# Altium PCB hd-hdr-alt.PcbDoc
Units mil, origin at the board's own origin, x right, y up, seen from the top; angles counter-clockwise.
Board outline 1400 x 650 mil, 6 copper layers (Top, 2-GND, 3-SIG, 4-SIG, 5-GND, Bottom), stack 46.142 mil thick; 54 components, 39 nets, 207 pads, 114 vias.
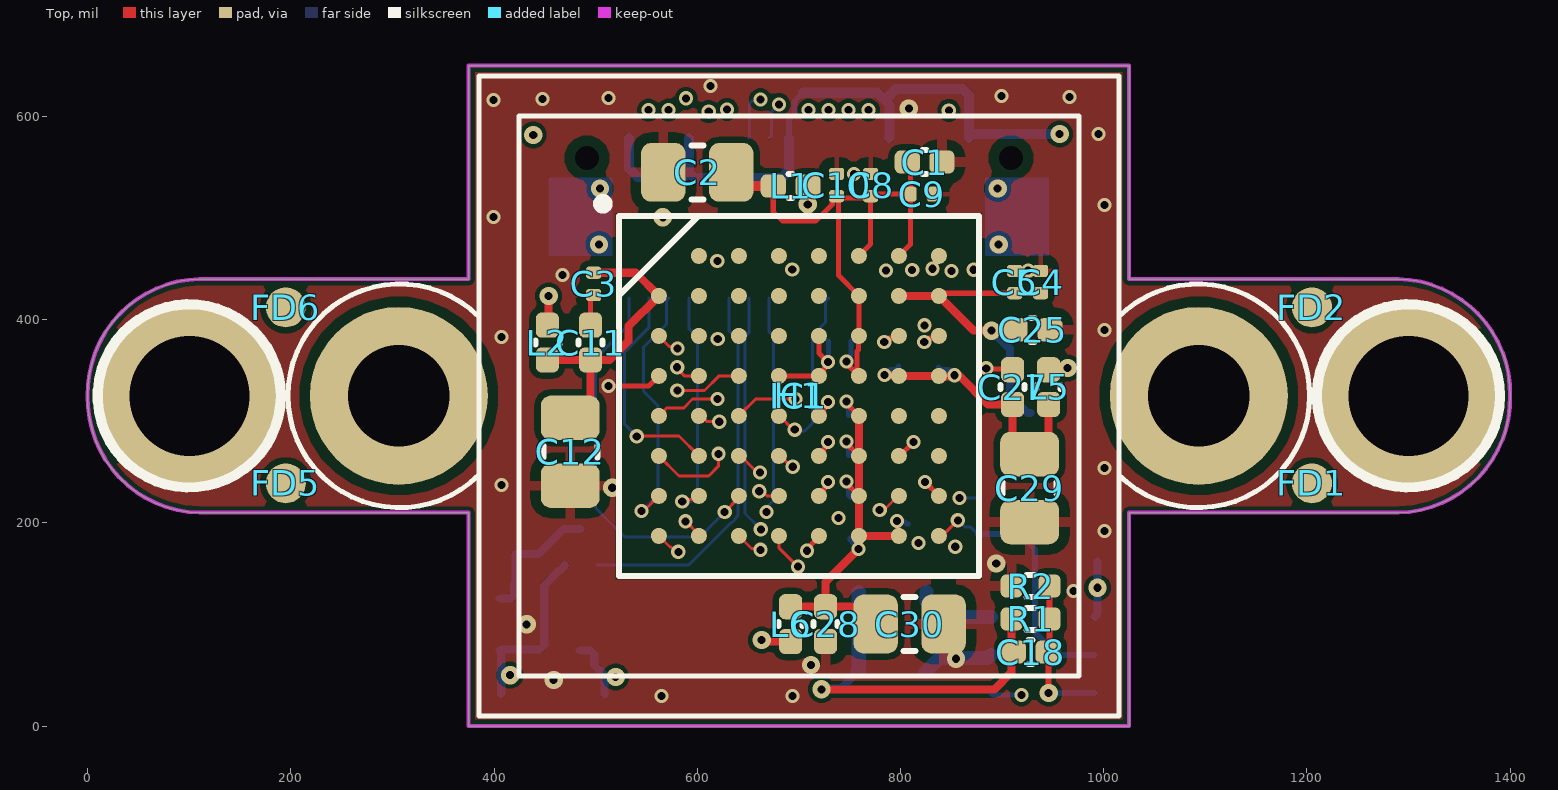
[diagram p0: Top view]
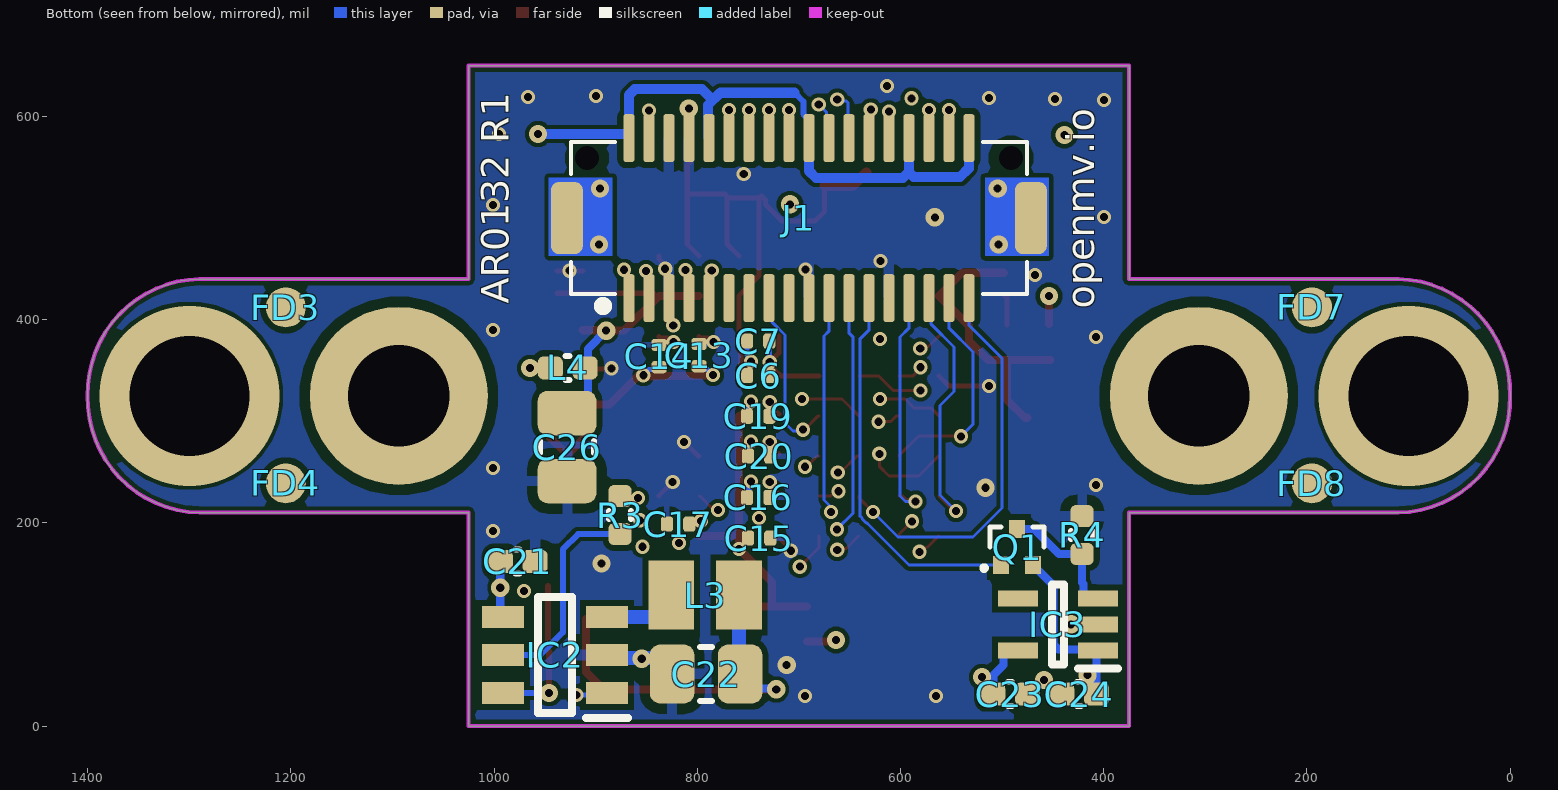
[diagram p1: Bottom view, seen from below]
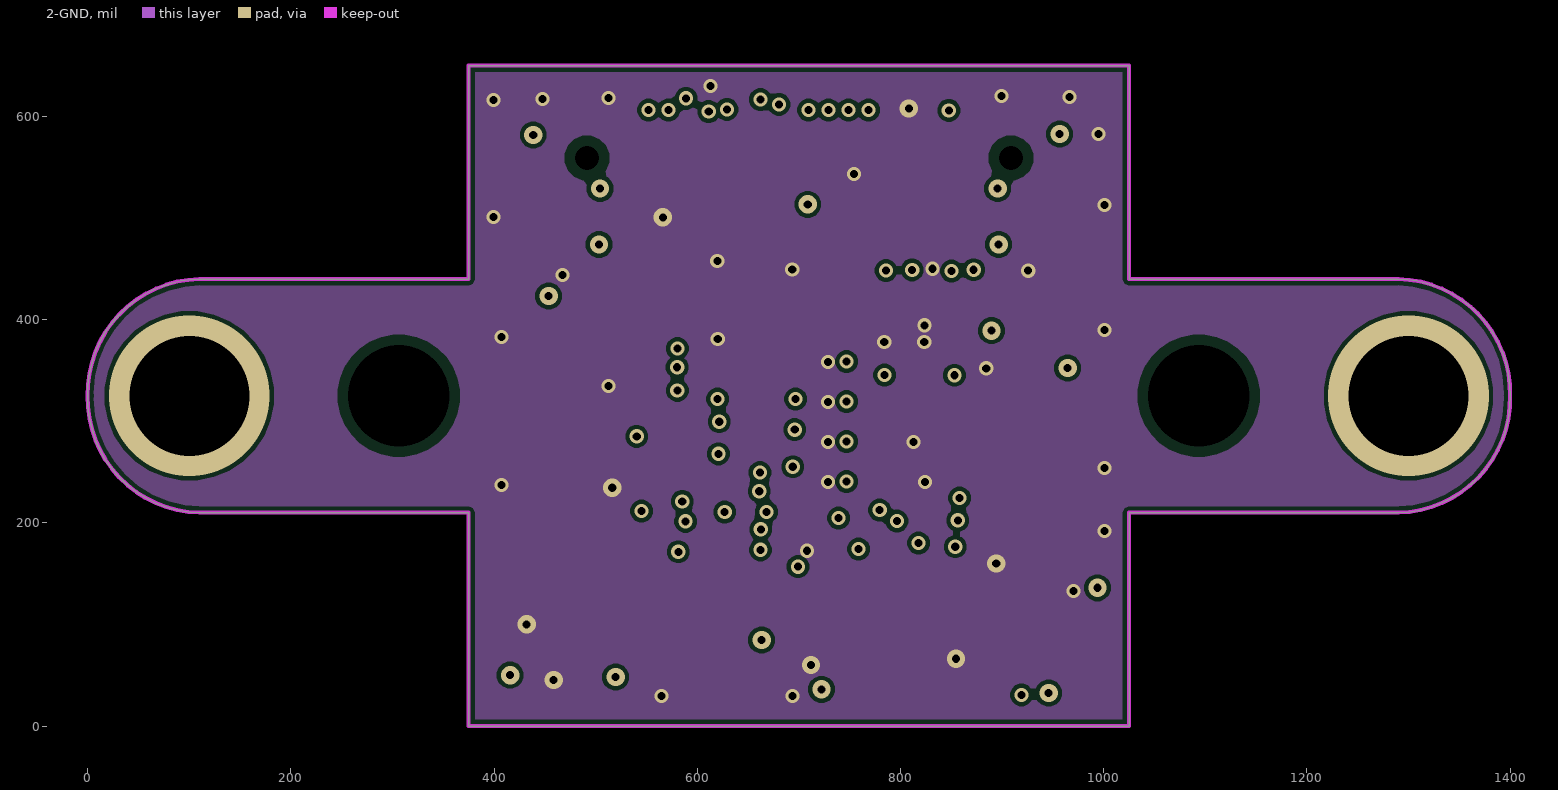
[diagram p2: 2-GND]
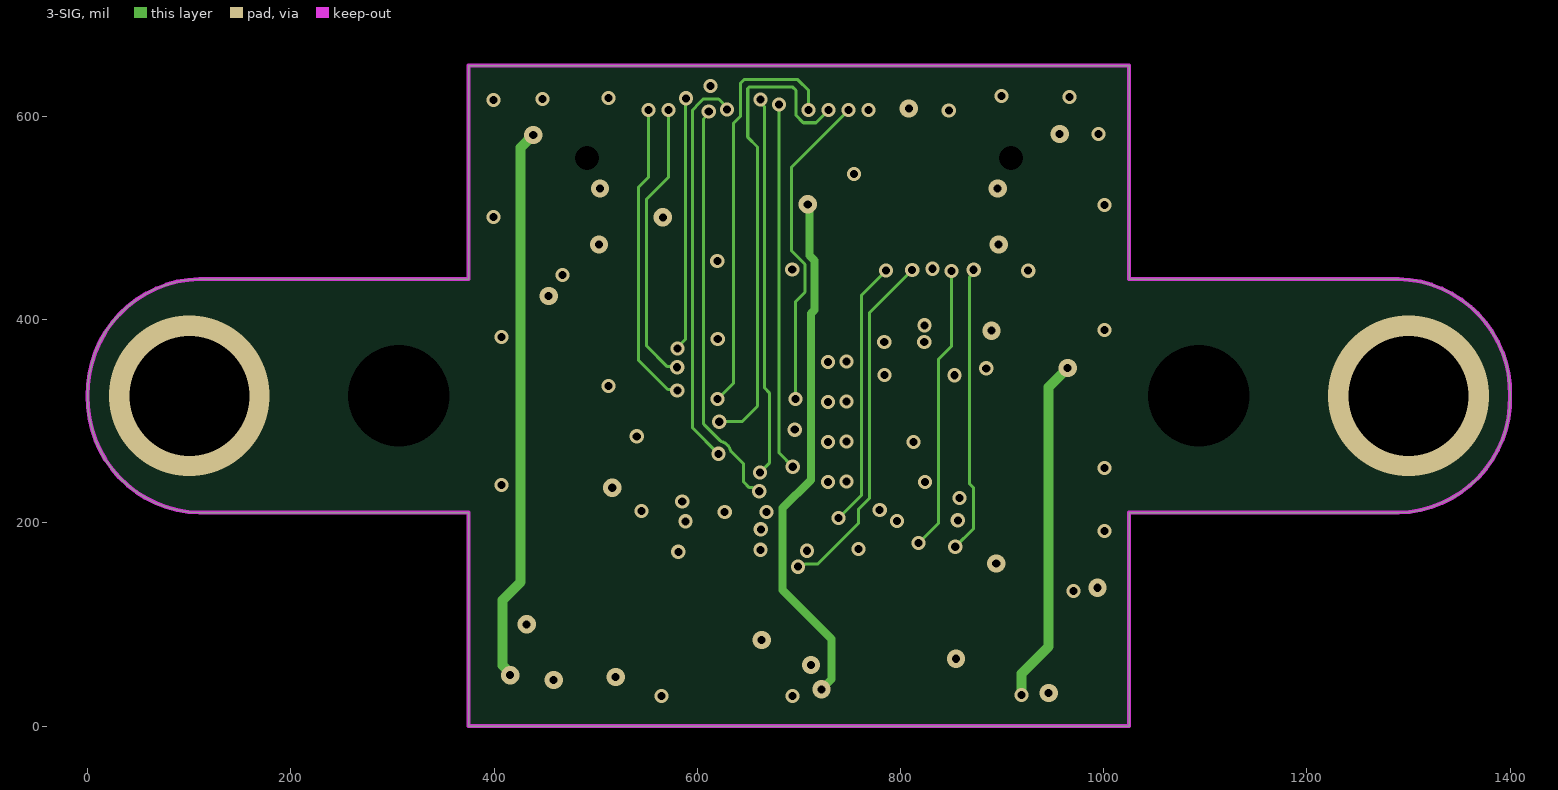
[diagram p3: 3-SIG]
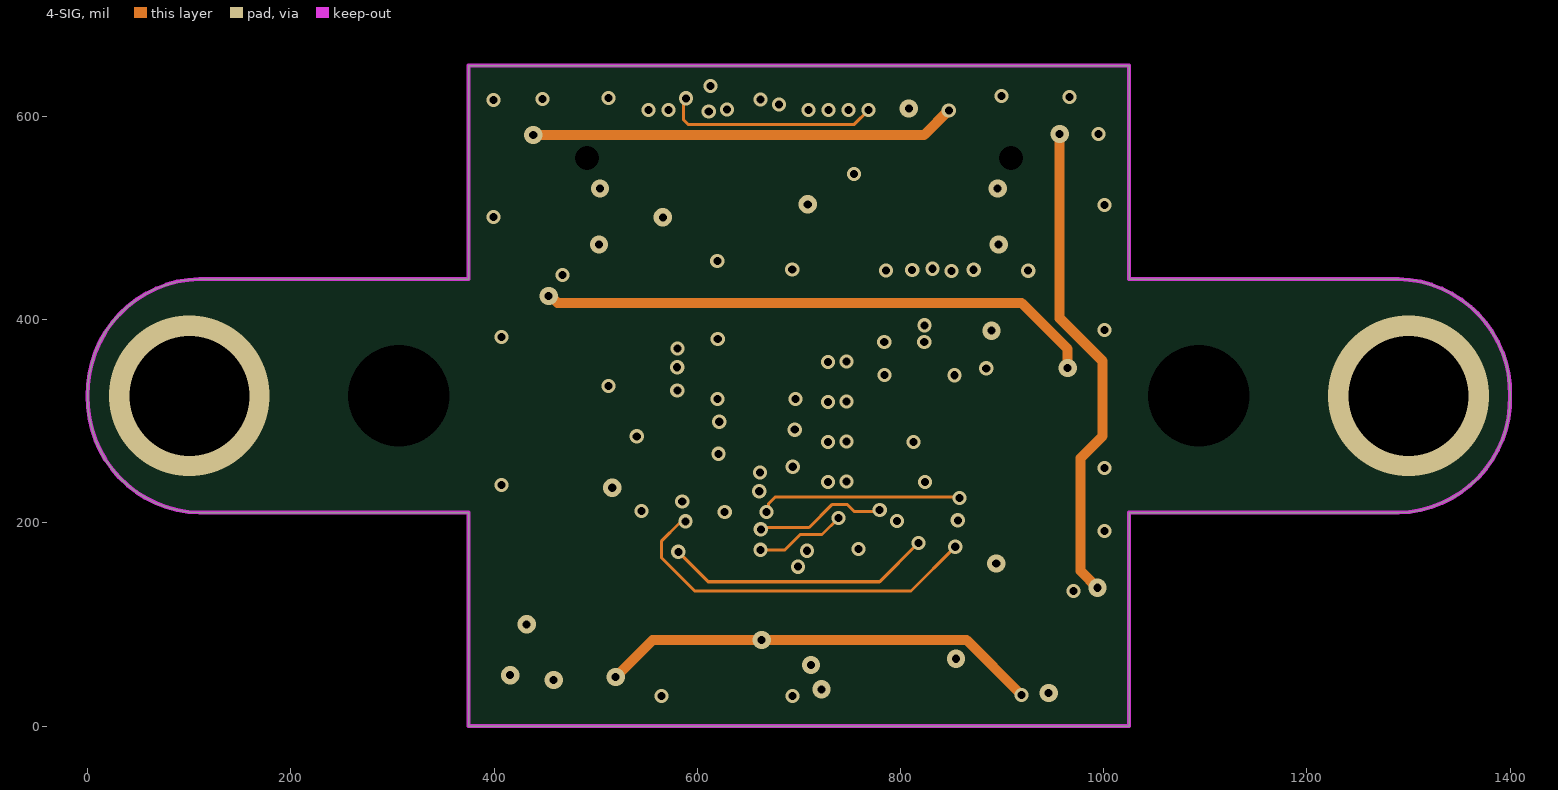
[diagram p4: 4-SIG]
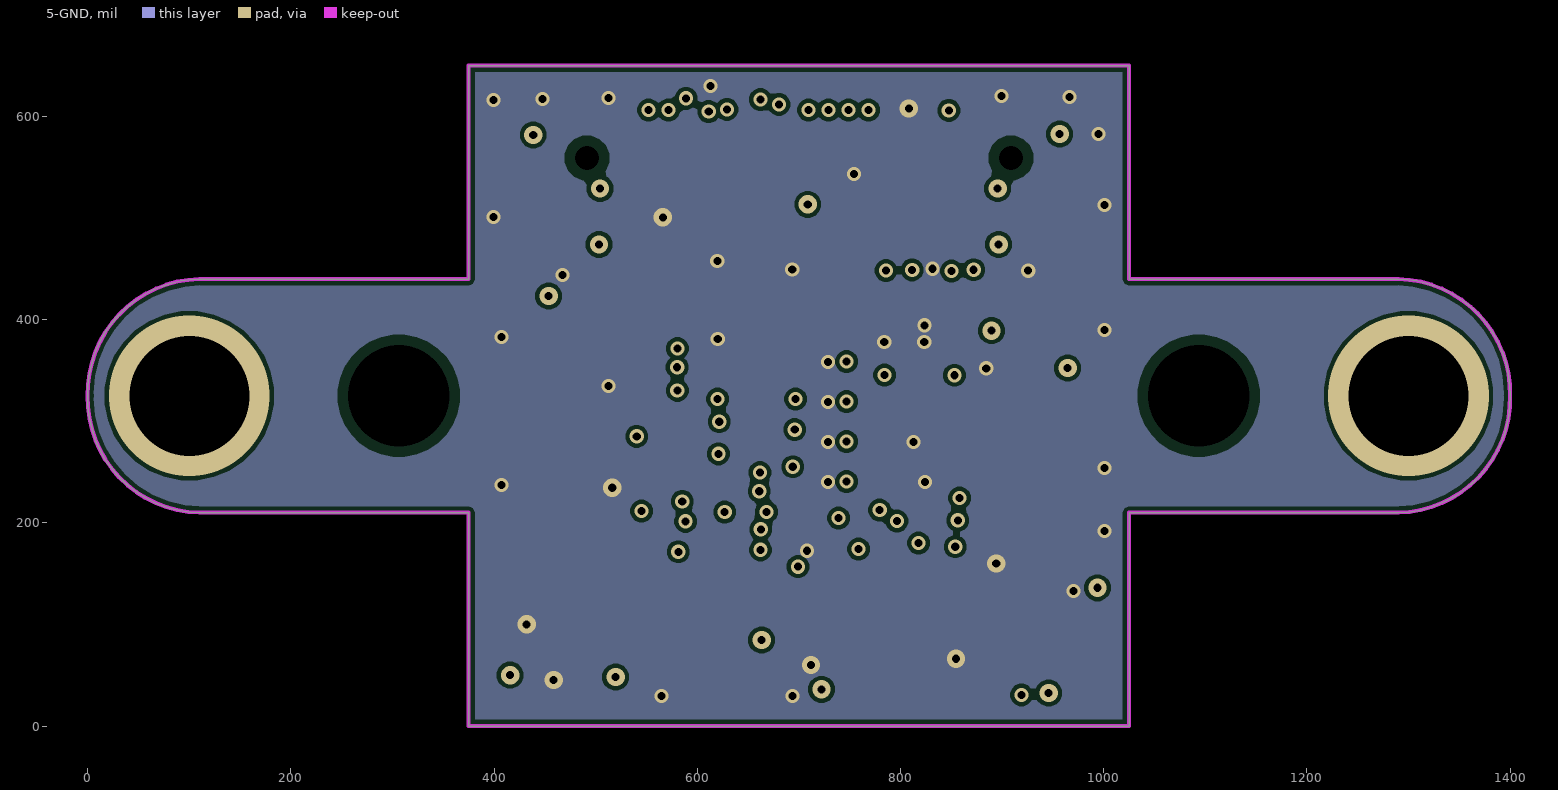
[diagram p5: 5-GND]
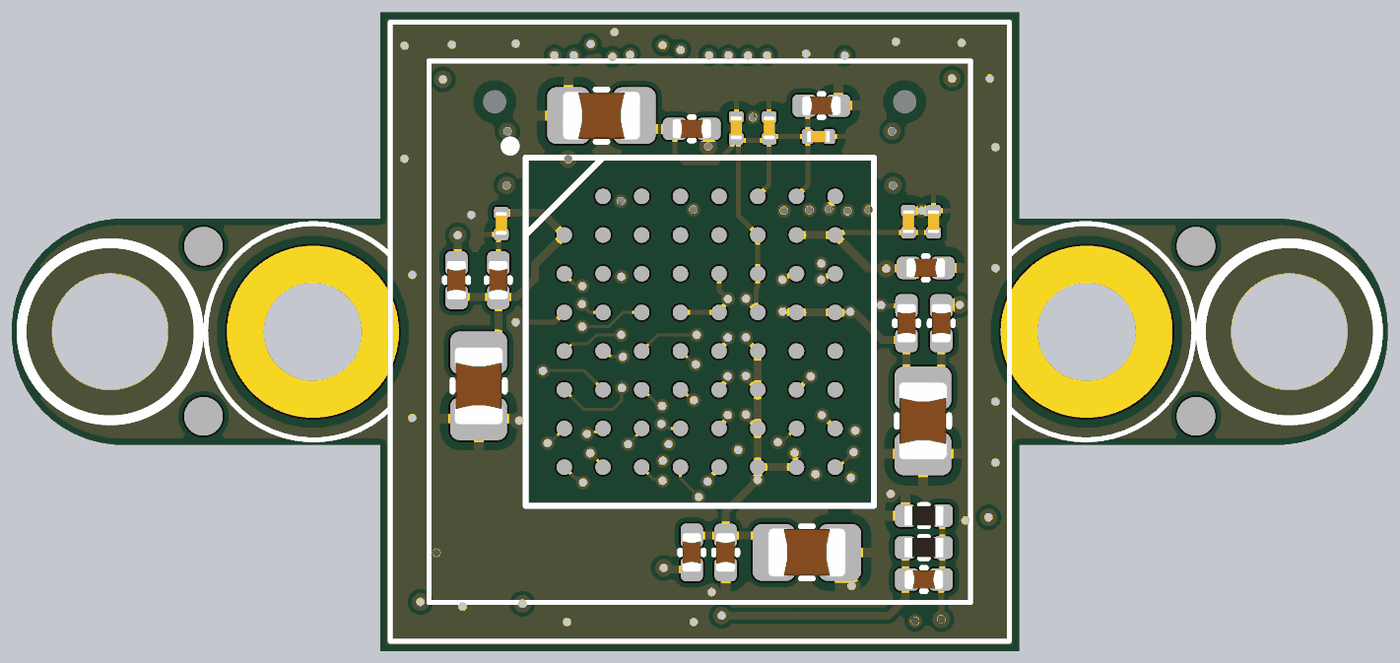
[diagram p6: 3D render of the assembled board from above, using the file's embedded part models]
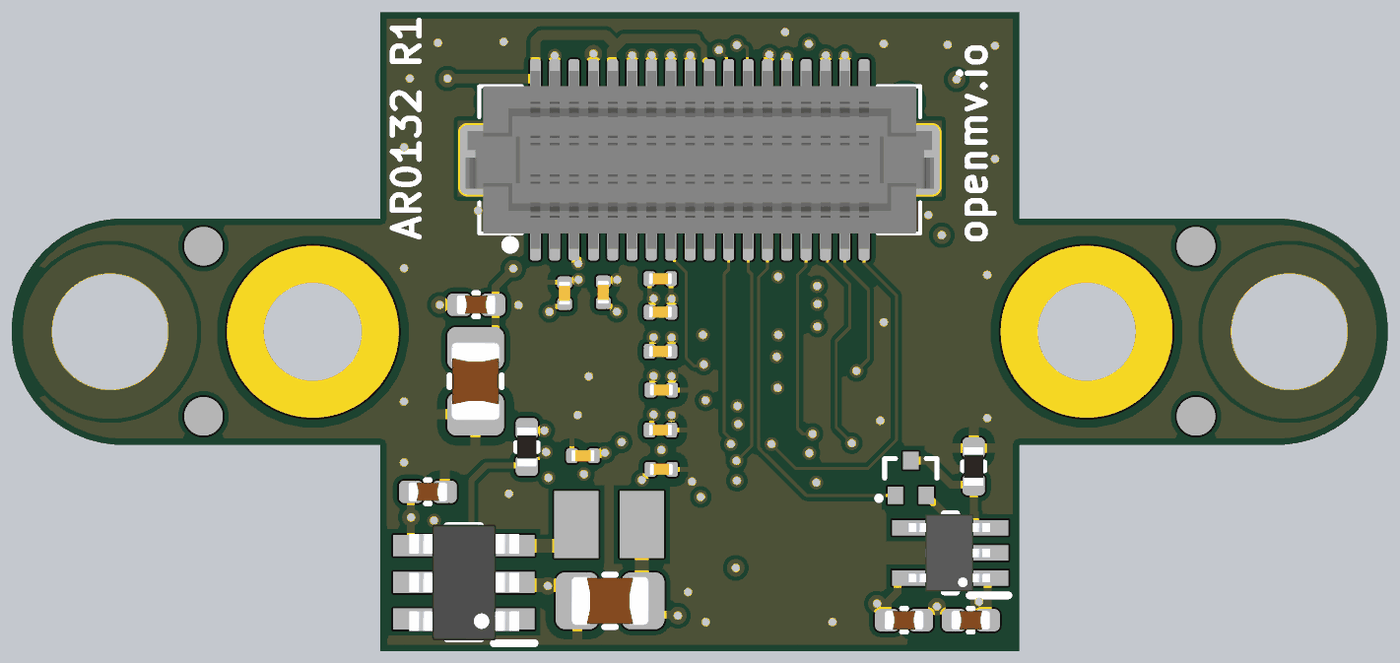
[diagram p7: 3D render of the assembled board from below, using the file's embedded part models]

## Layer stack, top to bottom
Top Solder: solder mask 0.4, Solder Resist, Dk 3.5
Top: signal copper 1.378
Dielectric 2: prepreg 5, PP-006, Dk 4.1
2-GND: signal copper 1.378
Dielectric 3: prepreg 10, PP-006, Dk 4.1
3-SIG: signal copper 1.378
Dielectric 1: dielectric 7.874, FR-4, Dk 4.8
4-SIG: signal copper 1.378
Dielectric 4: prepreg 10, PP-006, Dk 4.1
5-GND: signal copper 1.378
Dielectric 5: prepreg 5, PP-006, Dk 4.1
Bottom: signal copper 1.378
Bottom Solder: solder mask 0.4, Solder Resist, Dk 3.5

## Board outline
1290.03,210 1025.03,210 1025.03,0 375.03,0 375.03,210 110.03,210 cw(c112.53,322.5) 0.03,325 cw(c112.53,327.5) 110.03,440 375.03,440 375.03,650 1025.03,650 1025.03,440 1290.03,440 cw(c1287.53,327.5) 1400.03,325 cw(c1287.53,322.5)

## Design rules (kind name [scope] priority, off if disabled: settings)
BoardOutlineClearance mdCopperDimension [All] p1: gap=4 ignorepadtopadclearanceinfootprint=FALSE
Clearance [All] p1: gap=4 ignorepadtopadclearanceinfootprint=FALSE except(6: SMDPad-Fill SMDPad-Poly SMDPad-Region; 10: THPad-Fill THPad-Poly THPad-Region)
ComponentClearance "lens cover" [InComponent('H1')] p1: gap=0 collisioncheckmode=3 verticalgap=0 showdistances=FALSE
ComponentClearance [All] p2: gap=10 collisioncheckmode=3 verticalgap=10 showdistances=FALSE
HoleSize HoleSize_For_NetClass_signal [InNetClass('signal')] p1: absolutevalues=TRUE maxlimit=4 minlimit=4 maxpercent=80.000 minpercent=20.000
HoleSize HoleSize_For_NetClass_pwr [InNetClass('pwr')] p2: absolutevalues=TRUE maxlimit=4 minlimit=4 maxpercent=80.000 minpercent=20.000
HoleSize HoleSize_For_NetClass_gnd [InNetClass('gnd')] p3: absolutevalues=TRUE maxlimit=4 minlimit=4 maxpercent=80.000 minpercent=20.000
HoleSize [All] p4: absolutevalues=TRUE maxlimit=100000 minlimit=4 maxpercent=80.000 minpercent=20.000
HoleToHoleClearance mdDrill [All] p1: gap=3 allowstackedmicrovias=TRUE
MinimumSolderMaskSliver [All] p1 off: minsoldermaskwidth=10
PasteMaskExpansion Expansion_SMDPaste_OFF [InPadClass('SMDPaste_OFF')] p1: expansion=0
PasteMaskExpansion mlMinCreamFrame [All] p2: expansion=0
PolygonConnect 0201 [HasFootprint('C0201')] p1: thpad.connectstyle=Relief thpad.reliefconductorwidth=5 thpad.reliefentries=4 thpad.polygonreliefangle="90 Angle" thpad.airgapwidth=10 smdpad.connectstyle=Relief smdpad.reliefconductorwidth=5 smdpad.reliefentries=4 smdpad.polygonreliefangle="90 Angle" smdpad.airgapwidth=10 via.connectstyle=Relief via.reliefconductorwidth=10 via.reliefentries=4 via.polygonreliefangle="90 Angle" via.airgapwidth=10
PolygonConnect [All] p2: thpad.connectstyle=Relief thpad.reliefconductorwidth=10 thpad.reliefentries=4 thpad.polygonreliefangle="90 Angle" thpad.airgapwidth=10 smdpad.connectstyle=Relief smdpad.reliefconductorwidth=10 smdpad.reliefentries=4 smdpad.polygonreliefangle="90 Angle" smdpad.airgapwidth=10 via.connectstyle=Direct via.reliefconductorwidth=10 via.reliefentries=4 via.polygonreliefangle="90 Angle" via.airgapwidth=10
RoutingVias [All] p1: holewidth=8 width=16 viastyle="Through Hole" minholewidth=8 minwidth=14 maxholewidth=100 maxwidth=100
SolderMaskExpansion mlMinStopFrame [All] p1: expansion=2 istentingtop=FALSE
Width [All] p1: maxlimit=100 minlimit=3 preferedwidth=3
25 further rules are at their usual default settings.

## Classes and differential pairs
pad class SMDPaste_OFF: FD1-1 FD2-1 FD3-1 FD4-1 FD5-1 FD6-1 FD7-1 FD8-1 J1-1 J1-2 J1-3 J1-4 J1-5 J1-6 J1-7 J1-8 J1-9 J1-10 J1-11 J1-12 J1-13 J1-14 J1-15 J1-16 J1-17 J1-18 J1-19 J1-20 J1-21 J1-22 J1-23 J1-24 J1-25 J1-26 J1-27 J1-28 J1-29 J1-30 J1-31 J1-32 J1-33 J1-34 J1-35 J1-36

## Components (designator, comment, footprint, x,y, rotation, side; value= is the part's Value field where it differs from the comment)
C1 "4.7uF" 0402 823.82,555.12 r180 top
C2 "22uF" 0805 600.03,545 r0 top
C3 "0.22uF" C0201 498.03,435.21 r270 top
C4 "0.22uF" C0201 937.99,437.01 r90 top
C5 "0.22uF" C0201 912.4,437.01 r90 top
C6 "0.22uF" C0201 740.03,345 r180 bottom
C7 "0.22uF" C0201 740.16,378.94 r180 bottom
C8 "0.22uF" C0201 770.67,532.48 r90 top
C9 "0.22uF" C0201 820.87,523.62 r0 top
C10 "0.22uF" C0201 737.2,532.48 r90 top
C11 "4.7uF" 0402 495.03,377.5 r270 top
C12 "22uF" 0805 475.03,270 r90 top
C13 "0.22uF" C0201 798.23,365.16 r90 bottom
C14 "0.22uF" C0201 837.6,364.17 r90 bottom
C15 "0.22uF" C0201 739.17,185.04 r180 bottom
C16 "0.22uF" C0201 740.03,225 r180 bottom
C17 "0.22uF" C0201 818.9,198.82 r0 bottom
C18 "6.8pF" 0402 928.15,72.83 r0 top
C19 "0.22uF" C0201 740.03,305 r180 bottom
C20 "0.22uF" C0201 739.17,265.75 r180 bottom
C21 "4.7uF" 0402 976.76,162.09 r0 bottom
C22 "22uF" 0805 791.34,51.18 r180 bottom
C23 "4.7uF" 0402 492.13,31.5 r0 bottom
C24 "4.7uF" 0402 424.21,31.5 r180 bottom
C25 "4.7uF" 0402 930.03,390 r180 top
C26 "22uF" 0805 928.15,274.61 r90 bottom
C27 "4.7uF" 0402 910.43,333.66 r270 top
C28 "4.7uF" 0402 726.38,100.39 r90 top
C29 "22uF" 0805 927.17,234.25 r90 top
C30 "22uF" 0805 809.06,100.39 r180 top
FD1 "FIDUCIAL1X2" FIDUCIAL-1X2 1205.03,238.94 r0 top
FD2 "FIDUCIAL1X2" FIDUCIAL-1X2 1205.03,412.05 r0 top
FD3 "FIDUCIAL1X2" FIDUCIAL-1X2 1205.03,412.05 r180 bottom
FD4 "FIDUCIAL1X2" FIDUCIAL-1X2 1205.03,238.94 r180 bottom
FD5 "FIDUCIAL1X2" FIDUCIAL-1X2 195.03,238.94 r0 top
FD6 "FIDUCIAL1X2" FIDUCIAL-1X2 195.03,412.05 r0 top
FD7 "FIDUCIAL1X2" FIDUCIAL-1X2 195.03,412.05 r180 bottom
FD8 "FIDUCIAL1X2" FIDUCIAL-1X2 195.03,238.94 r180 bottom
H1 "LENSMOUNT20MM" LENSMOUNT-20MM 700.03,325 r0 top locked
IC1 "AR0132AT6C00XPEA0" AR0132AT6C00XPEA0 700.03,325 r0 top locked
IC2 "TLV62568PDDCR" SOT95P280X110-6N 940.03,70 r0 bottom
IC3 "MIC5365-2.8YC5-TR" SOT65P210X110-5N 445.03,100 r0 bottom
J1 "DF12-36-DP" DF12-36-DP 700.03,500 r0 bottom locked
L1 "100" 0402 691.93,531.5 r0 top
L2 "100" 0402 452.53,377.5 r90 top
L3 "MAKK2016T2R2M" INDC2016X100N 792.32,128.94 r0 bottom
L4 "100" 0402 927.53,352.5 r0 bottom
L5 "100" 0402 945.87,333.66 r90 top
L6 "100" 0402 691.93,100.39 r270 top
Q1 "SSM3J15FV,L3F" SSM3J15FV 485.24,176.18 r180 bottom
R1 "200K" R0402 928.15,105.31 r180 top
R2 "100K" R0402 928.15,137.8 r180 top
R3 "10K" R0402 875.98,207.68 r90 bottom
R4 "100K" R0402 421.26,187.99 r90 bottom

## Footprints (in the part's own frame and the unit in brackets; to place one, negate y for a bottom-side part, rotate by r counter-clockwise, add the part's x,y. Pads: shape width x height; smd on the part's side, far side on the other; paste and mask are expansions set on the pad)
0402 [mm] "Chip Capacitor, 2-Leads, Body  0402 (in) 1005 (mm), IPC Medium Density"
  rrect52% 0.63x0.58 smd mask+0.05: 1(-0.435,0) 2(0.435,0)
  silkscreen extent -0.05,-0.3 0.05,0.3, body extent -0.5,-0.25 0.5,0.25, height 0.5
0805 [mm] "Chip Capacitor, Body 0805 imperial, 2.0x1.2mm, IPC Medium Density"
  rrect45% 1.11x1.47 smd: 1(-0.85,0) 2(0.85,0)
  silkscreen extent -0.15,-0.67 0.15,0.67, body extent -1,-0.62 1,0.63, height 1.25
AR0132AT6C00XPEA0 [mil] "AR0132AT6C00XPEA0"
  rrect100% 15.75x15.75 smd: P$1(-98.43,137.8) P$2(-59.06,137.8) P$3(-19.69,137.8) P$4(19.69,137.8) P$5(59.06,137.8) P$6(98.43,137.8) P$7(137.8,137.8) P$8(-137.8,98.43) P$9(-98.43,98.43) P$10(-59.06,98.43) P$11(-19.69,98.43) P$12(19.69,98.43) P$13(59.06,98.43) P$14(98.43,98.43) P$15(137.8,98.43) P$16(-137.8,59.06) P$17(-98.43,59.06) P$18(-59.06,59.06) P$19(-19.69,59.06) P$20(19.69,59.06) P$21(59.06,59.06) P$22(98.43,59.06) P$23(137.8,59.06) P$24(-137.8,19.69) P$25(-98.43,19.69) P$26(-59.06,19.69) P$27(-19.69,19.69) P$28(19.69,19.69) P$29(59.06,19.69) P$30(98.43,19.69) P$31(137.8,19.69) P$32(-137.8,-19.69) P$33(-98.43,-19.69) P$34(-59.06,-19.69) P$35(-19.69,-19.69) P$36(19.69,-19.69) P$37(59.06,-19.69) P$38(98.43,-19.69) P$39(137.8,-19.69) P$40(-137.8,-59.06) P$41(-98.43,-59.06) P$42(-59.06,-59.06) P$43(-19.69,-59.06) P$44(19.69,-59.06) P$45(59.06,-59.06) P$46(98.43,-59.06) P$47(137.8,-59.06) P$48(-137.8,-98.43) P$49(-98.43,-98.43) P$50(-59.06,-98.43) P$51(-19.69,-98.43) P$52(19.69,-98.43) P$53(59.06,-98.43) P$54(98.43,-98.43) P$55(137.8,-98.43) P$56(-137.8,-137.8) P$57(-98.43,-137.8) P$58(-59.06,-137.8) P$59(-19.69,-137.8) P$60(19.69,-137.8) P$61(59.06,-137.8) P$62(98.43,-137.8) P$63(137.8,-137.8)
  silkscreen extent -198,-177 177,194, body extent -177,-177 177,177, height 39
C0201 [mil] "0201 IPC-7351"
  rrect50% 12x15 smd mask+1.97: 1(-11,0) 2(11,0)
  body extent -12,-6 12,6, height 14
DF12-36-DP [mm] "36 Position Connector Receptacle, Center Strip Contacts Surface Mount Gold"
  rrect50% 0.8x1.8 smd mask+0.05: 0(-5.8,0) 0(5.8,0)
  rrect50% 0.28x1.2 smd mask+0.05: 1(4.25,2) 2(4.25,-2) 3(3.75,2) 4(3.75,-2) 5(3.25,2) 6(3.25,-2) 7(2.75,2) 8(2.75,-2) 9(2.25,2) 10(2.25,-2) 11(1.75,2) 12(1.75,-2) 13(1.25,2) 14(1.25,-2) 15(0.75,2) 16(0.75,-2) 17(0.25,2) 18(0.25,-2) 19(-0.25,2) 20(-0.25,-2) 21(-0.75,2) 22(-0.75,-2) 23(-1.25,2) 24(-1.25,-2) 25(-1.75,2) 26(-1.75,-2) 27(-2.25,2) 28(-2.25,-2) 29(-2.75,2) 30(-2.75,-2) 31(-3.25,2) 32(-3.25,-2) 33(-3.75,2) 34(-3.75,-2) 35(-4.25,2) 36(-4.25,-2)
  round 0 hole 0.6 unplated: MH1(-5.3,-1.5) MH2(5.3,-1.5)
  silkscreen extent -5.7,-1.9 5.7,2.3, body extent -6.05,-2.3 6.05,2.3, height 2.3
FIDUCIAL-1X2 [mm] "FIDUCIAL-1X2"
  rrect100% 1x1 smd paste+0: 1(0,0)
INDC2016X100N [mm] "INDC2016X100N"
  rect 1.14x1.73 smd: 1(-0.847,0) 2(0.847,0)
  body extent -1,-0.8 1,0.8, height 1
LENSMOUNT-20MM [mil] "LENSMOUNT-20MM"
  round 175 / inner round 0 / far side round 175 hole 100: P$1(-393.7,0) P$2(393.7,0)
  silkscreen extent -503,-315 503,315
R0402 [mm] "Chip Resistor, 2-Leads, Body  0402 (in) 1005 (mm), IPC Medium Density"
  rrect51% 0.55x0.58 smd mask+0.05: 1(-0.475,0) 2(0.475,0)
  silkscreen extent -0.1,-0.28 0.1,0.28, body extent -0.5,-0.25 0.5,0.25, height 0.34
SOT65P210X110-5N [mm] "SOT65P210X110-5N"
  rect 1x0.4 smd: 1(-1,0.65) 2(-1,0) 3(-1,-0.65) 4(1,-0.65) 5(1,0.65)
  silkscreen extent -1.5,-1 0.15,1.1, body extent -1.02,-1 1.07,1, height 0.96
SOT95P280X110-6N [mil] "SOT95P280X100-6N"
  rect 41.34x21.65 smd: 1(-51.18,37.4) 2(-51.18,0) 3(-51.18,-37.4) 4(51.18,-37.4) 5(51.18,0) 6(51.18,37.4)
  silkscreen extent -72,-57 17,62, body extent -56,-59 56,59, height 44
SSM3J15FV [mm]
  rect 0.4x0.45 smd: 1(-0.4,-0.45) 2(0.4,-0.45) 3(0,0.45)
  silkscreen extent -0.88,-0.58 0.67,0.5, body extent -0.6,-0.6 0.6,0.6, height 0.6

## Part data
C1 C11 C21 C23 C24 C25 C27 C28: library part CAP_0402, "0402 (1005 Metric) Nick Garner - TeleSense", MPN=JMK105BBJ475MV-F, DeviceSetName=CAP_0402, GateName_1=G$1, LibraryName=0402, SymbolName_1=CAP
C2 C12 C22 C26 C29 C30: library part 22UF-0805-6.3V-20%, "22ÂµF ceramic capacitors    A capacitor is a passive two-terminal electrical component used to store electrical energy temporarily in an electric field.", MPN=CL21A226MQQNNNE, DeviceName=-0805-6.3V-20%, DeviceSetName=22UF, GateName_1=G$1, LibraryName=SparkFun-Capacitors, PROD_ID=CAP-08402, SymbolName_1=CAP
C3 C4 C5 C6 C7 C8 C9 C10 C13 C14 C15 C16 C17 C19 C20: library part C-EUC0201, "CAPACITOR, European symbol", MPN=GRM033R60J224ME15D, DeviceName=C0201, DeviceSetName=C-EU, GateName_1=G$1, LibraryName=rcl, POPULARITY=0, SPICEPREFIX=C, SymbolName_1=C-EU
C18: library part CAP_0402, "0402 (1005 Metric) Nick Garner - TeleSense", MPN=GRM1555C1H6R8DA01D, DeviceSetName=CAP_0402, GateName_1=G$1, LibraryName=0402, SymbolName_1=CAP
FD1 FD2 FD3 FD4 FD5 FD6 FD7 FD8: "Fiducial Alignment Points    Point-of-reference for pick-and-place machines and other optical instruments.", DeviceName=1X2, DeviceSetName=FIDUCIAL, GateName_1=G$1, LibraryName=SparkFun-Aesthetics, SymbolName_1=FIDUCIAL
IC1: MPN=AR0132AT6C00XPEA0-TPBR, DeviceSetName=AR0132AT6C00XPEA0, GateName_1=G$1, LibraryName=AR0132AT6C00XPEA0, Part Number=AR0132AT6C00XPEA0-TPBR, SymbolName_1=AR0132AT6C00XPEA0
IC2: "2.5V-5.5V input, 1A high efficiency step-down buck converter in SOT23 and SOT563 package   Source:  Datasheet", MANUFACTURER_NAME="Texas Instruments", DeviceSetName=TLV62568PDDCR, GateName_1=G$1, HEIGHT=1.1mm, LibraryName=TLV62568PDDCR, MANUFACTURER_PART_NUMBER=TLV62568PDDCR, MOUSER_PART_NUMBER=595-TLV62568PDDCR, MOUSER_PRICE-STOCK=https://www.mouser.co.uk/ProductDetail/Texas-Instruments/TLV62568PDDCR?qs=1mbolxNpo8f1FPchIXcxyQ%3D%3D, MPN=TLV62568PDDCR, SymbolName_1=TLV62568PDDCR
IC3: "IC REG LINEAR 2.8V 150MA SC70-5   Source:  Datasheet", MANUFACTURER_NAME=Microchip, DeviceSetName=MIC5365-2.8YC5-TR, GateName_1=G$1, HEIGHT=1.1mm, LibraryName=MIC5365-2.8YC5-TR, MANUFACTURER_PART_NUMBER=MIC5365-2.8YC5-TR, MOUSER_PART_NUMBER=998-MIC5365-2.8YC5TR, MOUSER_PRICE-STOCK=https://www.mouser.co.uk/ProductDetail/Microchip-Technology-Atmel/MIC5365-2.8YC5-TR?qs=U6T8BxXiZAX3mJDSWJyjVA%3D%3D, MPN=MIC5365-2.8YC5-TR, SymbolName_1=MIC5365-2.8YC5-TR
J1: MPN=DF12NB(3.0)-36DP-0.5V(51), DeviceSetName=DF12-36-DP, GateName_1=G$1, LibraryName=DF12NB(3.0)-36DP-0.5V(51), SymbolName_1=DF12-36
L1 L2 L4 L5 L6: library part INDUCTOR_0402, MPN=MFBM1V1005-101-R, DeviceSetName=INDUCTOR_0402, GateName_1=G$1, LibraryName=0402, SymbolName_1=INDUCTOR
L3: "INDUCTOR, METAL CORE Check availability", PACKAGE="2016 Taiyo Yuden", AVAILABILITY="In Stock", DeviceSetName=MAKK2016T2R2M, GateName_1=G$1, LibraryName=MAKK2016T2R2M, MF="Taiyo Yuden", MP=MAKK2016T2R2M, MPN=MAKK2016T2R2M, PRICE=None, PURCHASE-URL=https://pricing.snapeda.com/search/part/MAKK2016T2R2M/?ref=eda, SymbolName_1=MAKK2016T2R2M
Q1: library part PMOS, GateName_1=G$1, MANUFACTURER_PART_NUMBER=SSM3J15FV,L3F, MPN=SSM3J15FV,L3F, Part Number=SSM3J15FV,L3F
R1: library part R-US_R0402, "RESISTOR, American symbol", MPN=CRCW0402200KFKEDC, DeviceName=R0402, DeviceSetName=R-US_, GateName_1=G$1, LibraryName=rcl, POPULARITY=34, SPICEPREFIX=R, SymbolName_1=R-US
R2 R4: library part R-US_R0402, "RESISTOR, American symbol", MPN=AC0402FR-07100KL, DeviceName=R0402, DeviceSetName=R-US_, GateName_1=G$1, LibraryName=rcl, POPULARITY=34, SPICEPREFIX=R, SymbolName_1=R-US
R3: library part R-US_R0402, "RESISTOR, American symbol", MPN=AC0402FR-1310KL, DeviceName=R0402, DeviceSetName=R-US_, GateName_1=G$1, LibraryName=rcl, POPULARITY=34, SPICEPREFIX=R, SymbolName_1=R-US
H1: DeviceName=20MM, DeviceSetName=LENSMOUNT, GateName_1=G$1, LibraryName=lensmount, SymbolName_1=LENS

## Via types
v1: diameter 14, hole 8, Top to Bottom, tented both sides, 88 vias
v2: diameter 18, hole 8, Top to Bottom, tented both sides, 24 vias
v3: diameter 177.17/158.11/158.11/158.11/158.11/177.17 (per signal layer), hole 118.11, Top to Bottom, 2 vias

## Nets (pads, with @x,y where several pads share a name; then routed paths per layer and width w, separated by ;. In a path a pad name is that pad's centre, name@x,y a point inside that pad or via, vN(x,y) a via of type N, cw(c..) or ccw(c..) an arc to the next point about the centre after c; other vN are vias at no path point)
DCMI_CLK: IC1.P$16 J1.12 | length 485.7
  Top w3: IC1.P$16 562.23,383.64 572.34,373.53 578.49,373.53 v1(580.55,371.48)
  3-SIG w3: v1(580.55,371.48) 580.55,372.67 588.47,380.59 588.47,617.26 v1(589.03,617.81)
  4-SIG w3: v1(589.03,617.81) 586.92,615.71 586.92,612.68 586.61,612.37 586.61,596.46 590.88,592.19 754.59,592.19 v1(768.7,606.3)
DCMI_D0: IC1.P$56 J1.3 | length 571.3
  Top w3: IC1.P$56 573.26,176.17 574.13,176.17 578.81,171.49 v1(581.39,171.49)
  3-SIG w3: v1(817.91,180.12) 837.6,199.8 837.6,361.22 850.39,374.02 v1(850.39,447.83)
  4-SIG w3: v1(581.39,171.49) 610.83,142.05 779.51,142.05 817.58,180.12 v1(817.91,180.12)
DCMI_D1: IC1.P$57 J1.1 | length 672.2
  Top w3: v1(588.57,201.48) 588.71,201.48 601.6,188.59 IC1.P$57
  3-SIG w3: v1(853.98,176.42) 872.05,194.49 872.05,234.25 868.11,238.19 868.11,442.13 872.09,446.12 v1(872.09,449.09)
  4-SIG w3: v1(588.57,201.48) 586.46,199.37 582.03,199.37 564.96,182.3 564.96,165.35 597.44,132.87 810.43,132.87 v1(853.98,176.42)
DCMI_D2: IC1.P$58 J1.9 | length 379.7
  Top w3: IC1.P$58 653.38,174.79 660.93,174.79 v1(662.29,173.43)
  3-SIG w3: v1(739.17,204.72) 761.81,227.36 761.81,424.3 v1(785.79,448.28)
  4-SIG w3: v1(662.29,173.43) 686.3,173.43 701.32,188.45 722.9,188.45 v1(739.17,204.72)
DCMI_D3: IC1.P$59 J1.7 | length 387.2
  Top w3: IC1.P$59@680.91,187.2 IC1.P$59 680.34,175.59 v1(699.06,156.87)
  3-SIG w3: v1(699.06,156.87) 701.16,158.98 705.95,158.98 706.31,159.34 718.39,159.34 758.86,199.8 758.86,213.58 769.68,224.41 769.68,407.12 v1(811.53,448.97)
DCMI_D4: IC1.P$48 J1.31 | length 255.4
  Top w3: v1(545.28,211.61) 546.61,212.95 548.61,212.95 IC1.P$48
  Bottom w3: v1(545.28,211.61) 561.17,227.51 561.17,315.42 547.24,329.35 547.24,373.03 569.83,395.62 569.83,419.02 J1.31
DCMI_D5: IC1.P$49 J1.29 | length 234.5
  Top w3: v1(585.25,221.06) 587.3,223.11 594.69,223.11 598.15,226.57 IC1.P$49
  Bottom w3: v1(585.25,221.06) 585.34,220.98 594.99,220.98 600.39,226.38 600.39,382.87 591.76,391.51 J1.29
DCMI_D6: IC1.P$50 J1.35 | length 391
  Top w3: v1(627.02,210.65) 640.97,224.6 IC1.P$50
  Bottom w3: J1.35 532.7,394.69 500,361.98 500,214.57 528.54,186.02 602.36,186.02 v1(627.02,210.65)
DCMI_D7: IC1.P$51 J1.28 | length 424.3
  Top w3: v1(660.99,231.08) 663.1,228.98 666.3,228.98 668.71,226.57 IC1.P$51
  3-SIG w3: v1(611.3,604.84) 611.3,602.71 606.17,597.58 606.17,297.38 607.05,296.5 622.76,280.78 623.36,280.18 cw(c620.82,267.94) 633.05,270.49 633.65,269.89 645.67,257.87 645.67,240.16 651.24,234.59 654.51,234.59 658.02,231.08 v1(660.99,231.08)
DCMI_D8: IC1.P$40 J1.26 | length 476
  Top w3: IC1.P$40 582.1,246.06 611.22,246.06 620.82,255.66 v1(620.82,267.94)
  3-SIG w3: v1(620.82,267.94) 595.47,293.29 595.47,606.3 598.8,609.62 598.8,610.02 606.12,617.34 614.94,617.34 615.16,617.13 621.06,617.13 629.18,609.01 v1(629.18,606.9)
DCMI_D9: IC1.P$41 J1.33 | length 220.3
  Top w3: v1(540.44,285.15) 540.73,285.43 582.1,285.43 IC1.P$41
  Bottom w3: v1(540.44,285.15) 528.54,297.05 528.54,368.11 552.39,391.96 J1.33
DCMI_D10: IC1.P$42 J1.24 | length 449.2
  Top w3: IC1.P$42 642.52,265.94 658.98,249.48 v1(661.67,249.48)
  3-SIG w3: v1(661.67,249.48) 670.96,258.78 670.96,328.01 666.34,332.64 666.34,609.39 665.77,609.96 665.77,610.13 662.22,613.69 v1(662.22,616.66)
  Bottom w3: J1.24 651.57,579.5 651.57,613.53 653.33,615.28 660.84,615.28 v1(662.22,616.66)
DCMI_D11: IC1.P$43 J1.22 | length 417.6
  Top w3: IC1.P$43 681.85,265.94 692.56,255.23 v1(694.08,255.23)
  3-SIG w3: v1(680.45,611.81) 680.45,268.86 v1(694.08,255.23)
  Bottom w3: J1.22 672.88,581.12 672.88,604.24 v1(680.45,611.81)
DCMI_FSIN: IC1.P$54 J1.23 | length 390.9
  Top w3: v1(779.54,212.6) 781.65,214.71 785.82,214.71 797.69,226.57 IC1.P$54
  4-SIG w3: v1(662.59,193.63) 664.41,195.45 710.21,195.45 733.03,218.26 747.34,218.26 754.21,211.39 778.33,211.39 v1(779.54,212.6)
  Bottom w3: J1.23 650.82,387.04 646.95,383.17 646.95,209.27 v1(662.59,193.63)
DCMI_HSYNC: IC1.P$32 J1.18 | length 477.1
  Top w3: IC1.P$32 569.82,312.9 586.48,312.9 595.43,321.85 v1(620.08,321.85)
  3-SIG w3: v1(620.08,321.85) 635.83,337.6 635.83,593.5 642.72,600.39 642.72,632.92 645.96,636.16 699.03,636.16 709.65,625.55 v1(709.65,606.3)
DCMI_PCLK: IC1.P$34 J1.14 | length 379.6
  Top w3: IC1.P$34 657.51,321.85 v1(696.85,321.85)
  3-SIG w3: v1(696.85,321.85) 696.85,417.96 705.99,427.11 705.99,454.44 692.91,467.53 692.91,550.2 v1(749.02,606.3)
DCMI_PWDN: J1.25 Q1.1 | length 377.2
  Bottom w3: Q1.1 591.54,158.46 632.47,199.4 ccw(c627.02,210.65) 638.26,205.19 639.95,206.88 639.95,380.72 631.13,389.54 J1.25
DCMI_PWDN_INT: IC3.3 Q1.3 R4.1 | length 130.4
  Bottom w8: IC3.3 416.05,125.59 419.92,129.47 419.92,139.86 421.26,141.19 R4.1 443.9,169.29 468.5,193.9 Q1.3
DCMI_RST: J1.21 R3.2 | length 434.1
  4-SIG w3: v1(668.29,210.7) 670.29,212.7 670.29,218.96 676.78,225.45 857.23,225.45 v1(858.27,224.41)
  Bottom w3: v1(668.29,210.7) 670.4,212.8 670.4,217.64 675.2,222.44 675.2,383.86 670.5,388.56 J1.21 ; v1(858.27,224.41) 874.02,224.41 R3.2
DCMI_SCL: IC1.P$25 J1.32 | length 305.6
  Top w3: v1(580.25,353.16) 580.25,351.78 587.34,344.69 IC1.P$25
  3-SIG w3: v1(571.85,606.3) 571.85,540.35 550.2,518.7 550.2,374.02 570.52,353.69 579.72,353.69 v1(580.25,353.16)
DCMI_SDA: IC1.P$26 J1.34 | length 367.4
  Top w3: v1(580.43,330.27) 607.23,330.27 621.65,344.69 IC1.P$26
  3-SIG w3: v1(552.17,606.3) 552.17,540.35 542.32,530.51 542.32,359.9 571.06,331.16 579.54,331.16 v1(580.43,330.27)
DCMI_VSYNC: IC1.P$33 J1.16 | length 497.6
  Top w3: IC1.P$33 603.98,305.31 609.73,299.56 v1(621.7,299.56)
  3-SIG w3: v1(621.7,299.56) 644.04,299.56 659.34,314.85 659.34,569.99 649.72,579.61 649.72,627.41 651.47,629.16 693.67,629.16 697.15,625.69 697.15,601.12 704.47,593.8 716.83,593.8 v1(729.33,606.3)
FB: C18.2 IC2.6 R1.1 R2.1 | length 151.6
  Top w6: v2(945.87,32.48) 945.87,72.24 C18.2 946.85,74.41 R1.1 R2.1
  Bottom w6: v2(945.87,32.48) 945.99,32.6 IC2.6
GND: C1.1 C2.1 C3.2 C4.2 C5.2 C6.2 C7.2 C8.2 C9.2 C10.2 C11.1 C12.1 C13.2 C14.2 C15.2 C16.2 C17.2 C19.2 C20.2 C21.1 C22.1 C23.1 C24.1 C25.1 C26.1 C27.1 C28.1 C29.1 C30.1 IC1.P$7 IC1.P$20 IC1.P$22 IC1.P$23 IC1.P$24 IC1.P$27 IC1.P$28 IC1.P$36 IC1.P$44 IC1.P$46 IC1.P$52 IC1.P$55 IC1.P$60 IC2.2 IC3.2 J1.5 J1.6 J1.8 J1.19 J1.27 R2.2 R4.2 | length 455
  Top w3: IC1.P$60@719.72,185.97 IC1.P$60
  Top w5: C11.1 495.03,421.21 C3.2 ; v1(512.8,334.65) 552.18,334.65 IC1.P$24 ; IC1.P$27 IC1.P$28 ; v1(707.92,172.54) 707.92,174.17 IC1.P$60@719.72,185.97 ; IC1.P$52 719.72,228.27 727.67,236.23 727.67,239.28 v1(728.63,240.24) ; IC1.P$44@719.72,267.64 v1@727.67,275.6 ; IC1.P$36@719.72,307.01 v1@727.67,314.97 ; IC1.P$28@719.72,346.39 v1@727.67,354.35 ; IC1.P$20 719.72,367.27 v1(728.63,358.36) ; v1(784.11,377.99) 785.46,377.99 789.48,382 797.09,382 IC1.P$22@798.23,383.14 ; IC1.P$46 799.4,265.94 v1(812.99,279.53) ; v1(823.48,377.99) 824.83,377.99 828.85,382 836.46,382 IC1.P$23@837.6,383.14 ; v1(824.24,240.16) IC1.P$55 ; v1(831.6,450.09) 831.6,452.52 834.31,455.23 834.31,456.37 837.83,459.89 IC1.P$7 ; v1(884.46,352.06) 885.15,351.38 909.84,351.38 C27.1 ; C5.2 C4.2
  Bottom w5: v1(728.63,358.36) 729.16,358.89 C7.2
  Bottom w14: C22.1@824.8,53.15 838.6,66.95 885.8,66.95 IC2.2
  other v1: 564.96,29.53 693.9,29.53 970.47,132.87 1000.98,191.93 407.48,237.2 1000.98,253.94 728.63,279.61 728.63,318.98 620.26,380.97 407.48,382.87 1000.98,389.76 823.72,394.39 467.52,443.9 925.7,448.2 693.49,449.27 619.8,457.8 399.61,500.98 1000.98,512.8 754.27,543.35 995.08,582.68 399.61,616.14 447.83,617.13 512.8,618.11 966.54,619.09 899.61,620.08 613.19,629.92
  other v2: 458.66,45.28 712.07,60.1 854.61,66.29 432.09,100.06 894.27,160.1 516.37,234.59 566.18,500.69 808.29,607.91
RESET_N: IC1.P$63 IC2.5 R3.1 | length 262.4
  Top w3: IC1.P$63 841.2,187.2 v1(856.49,202.49)
  Bottom w3: v1(856.49,202.49) 857.37,202.49 864.04,195.82 869.14,195.82 R3.1
  Bottom w6: R3.1 917.32,188.98 932.37,173.93 932.37,92.24 954.61,70 IC2.5
SPI_MISO: IC1.P$35 J1.15 | length 172.4
  Top w3: IC1.P$35 680.91,305.31 694.5,291.72 v1(695.95,291.72)
  Bottom w3: v1(695.95,291.72) 697.34,290.34 705.7,290.34 713.58,298.23 713.58,384.84 726.32,397.58 726.32,418.02 J1.15
SPI_MOSI: J1.17
SPI_SCLK: J1.13
SPI_SSEL: J1.11
SW: IC2.3 L3.2 | length 78.6
  Bottom w14: L3.2@825.67,131.89 825.67,122.84 841.11,107.4 IC2.3
VAA: C4.1 C5.1 C25.2 C26.2 IC1.P$14 IC1.P$15 L4.1 | length 329
  Top w5: IC1.P$15 840.74,423.43 843.31,426.01 C5.1 C4.1
  Top w8: IC1.P$14 IC1.P$15 872.08,389.18 v2(889.72,389.18) 890.13,389.59 912.49,389.59 C25.2
  Bottom w8: v2(889.72,389.18) 907.75,371.16 907.75,325.48 925.15,308.07 C26.2
VAA_PIX: C13.1 C14.1 C27.2 C29.2 IC1.P$30 IC1.P$31 L5.1 | length 288.1
  Top w8: v1(784.45,345.47) 784.6,345.32 797.82,345.32 IC1.P$30 IC1.P$31 838.42,344.1 851.4,344.1 852.55,345.25 v1(853.09,345.25) 853.47,344.87 857.89,344.87 886.22,316.54 C27.2 910.43,284.45 C29.2 928.46,267.72 945.87,285.12 L5.1
  Bottom w5: v1(784.45,345.47) 784.69,345.47 790.19,350.97 795.04,350.97 C13.1 ; C14.1 839.99,350.78 847.56,350.78 v1(853.09,345.25)
VCC: C21.2 IC2.4 J1.2 J1.10 J1.20 J1.30 J1.36 | length 1194.6
  4-SIG w10: v2(956.69,582.68) 956.69,401.41 999.02,359.09 999.02,285.43 977.36,263.78 977.36,152.6 v2(993.88,136.08)
  Bottom w6: J1.20 690.19,596.85 695.65,602.31 695.65,614.71 704.21,623.28
  Bottom w8: IC2.4 993.88,110.07 v2(993.88,136.08) C21.2
  Bottom w10: J1.36 532.7,548.99 541.34,540.35 586.89,540.35 591.76,545.23 ; J1.30 591.76,545.23 ; J1.20 690.19,546.48 683.07,539.37 597.62,539.37 591.76,545.23 ; 704.21,623.28 777.31,623.28 789.37,611.22 789.37,599.95 789.12,599.7 789.12,579.25 J1.10 ; 784.54,616.05 795.37,626.88 861.49,626.88 867.35,621.02 J1.2 ; J1.2@867.35,582.17 867.86,582.68 v2(956.69,582.68)
VDD: C1.2 C2.2 C6.1 C7.1 C8.1 C9.1 C10.1 IC1.P$5 IC1.P$6 IC1.P$13 IC1.P$21 IC1.P$29 L1.1 | length 612.5
  Top w5: L1.1 674.8,506.3 684.06,497.05 716.54,497.05 732.91,513.42 732.91,518.02 C10.1@734.64,519.75 ; C10.1 736.37,521.48 C10.1@734.64,519.75 ; v1@746.03,357.75 IC1.P$29@757.22,346.56 ; IC1.P$29 IC1.P$29@757.22,346.56 ; IC1.P$5 770.67,474.38 C8.1 ; IC1.P$6 809.87,474.21 C9.1 ; C1.2 809.87,551.94 C9.1 ; C10.1@734.64,519.75 C10.1@738.94,519.75 ; C10.1@738.94,519.75 768.94,519.75 C8.1 ; C10.1@738.94,519.75 739.17,519.51 739.17,443.34 IC1.P$13 IC1.P$21 758.89,383.87 758.89,370.33 757.22,368.65 IC1.P$29@757.22,346.56 ; C8.1 772.81,523.62 C9.1
  Top w10: C2.2 647,531.5 L1.1
  Bottom w5: v1(747.01,358.77) 747.01,361.2 751.16,365.35 C7.1
VDD_PLL: C3.1 C11.2 C12.2 IC1.P$8 L2.1 | length 284.8
  Top w8: L2.1 C11.2 ; C12.2 477.62,303.46 495.03,320.87 C11.2 ; C3.1 539.45,446.21 IC1.P$8 532.48,393.68 532.48,378.94 513.92,360.37 C11.2
VDD_REG: C18.1 C22.2 L1.2 L3.1 R1.2 | length 885.3
  Top w8: v2(722.33,36.14) 892.44,36.14 909.45,53.15 R1.2
  3-SIG w8: v2(708.78,513.48) 710.55,511.7 710.55,463.32 715.49,458.38 715.49,409.6 711.85,405.96 711.85,242.36 684.06,214.57 684.06,133.86 732.28,85.63 732.28,46.09 v2(722.33,36.14)
  Bottom w8: v2(722.33,36.14) 723.03,36.84 741.56,36.84 C22.2@757.87,53.15
  Bottom w14: C22.2@757.87,53.15 758.97,54.25 L3.1@758.97,131.89
VDDA: C24.2 IC3.1 J1.4 Q1.2 | length 1143.3
  3-SIG w10: v2(415.83,50.09) 415.83,52.25 408.46,59.62 408.46,124.02 426.18,141.73 426.18,569.39 v2(438.64,581.85)
  4-SIG w10: v2(438.64,581.85) 438.8,581.69 823.36,581.69 v1(847.64,605.96)
  Bottom w8: C24.2 407.09,72.98 IC3.1 406.62,75.37 444.66,75.37 449.48,80.2 449.48,138.46 464.63,153.61 465.61,153.61 469.49,157.48 Q1.2
VDDIO: C15.1 C16.1 C17.1 C19.1 C20.1 C28.2 C30.2 IC1.P$37 IC1.P$45 IC1.P$53 IC1.P$61 IC1.P$62 L6.1 | length 477.1
  Top w5: v1@746.03,240.65 746.03,239.63 IC1.P$53 ; v1@746.03,279 IC1.P$45 ; v1@746.03,318.37 IC1.P$37 ; IC1.P$61 IC1.P$61@759.26,187.2 ; v1(796.5,201.71) 797.46,200.75 797.46,188.2 IC1.P$62
  Top w8: L6.1 C28.2 ; IC1.P$61@759.09,186.74 759.09,174.44 v1(758.86,174.21) 726.38,141.73 C28.2 ; IC1.P$61 IC1.P$53 IC1.P$45 IC1.P$37 ; IC1.P$61@759.26,187.2 IC1.P$62 ; C30.2 758.46,117.52 C28.2
  Bottom w5: v1@746.03,240.65 746.03,239.3 748.9,236.43 748.9,227.13 C16.1 ; v1@746.03,280.02 746.03,278.67 748.9,275.8 C20.1@748.9,266.5 ; v1@746.03,319.39 746.03,318.04 748.9,315.17 C19.1@748.9,305.87 ; C15.1 750.17,183.27 753.67,179.77 753.67,179.64 758.86,174.46 v1(758.86,174.21) ; v1(796.5,201.71) 797.46,200.75 804.44,200.75 805.12,200.07 805.12,199.8 806.1,198.82 C17.1
  other v1: 747.01,240.65 747.01,280.02 747.01,319.39
VDDIO_REG: C23.2 IC2.1 IC3.5 L2.2 L4.2 L5.2 L6.2 | length 1477.3
  Top w5: L2.2 L2.2@453.74,395.84
  Top w8: L2.2@453.74,395.84 v2(453.74,423.23) ; v2(663.39,84.65) 664.76,83.27 L6.2
  3-SIG w10: v1(919.19,30.63) 919.19,51.63 945.87,78.31 945.87,333.66 v2(964.57,352.36)
  4-SIG w10: v2(453.74,423.23) 455.9,423.23 462.79,416.34 919.29,416.34 964.57,371.06 v2(964.57,352.36) ; v2(519.68,48.23) 556.1,84.65 v2(663.39,84.65) 865.18,84.65 v1(919.19,30.63)
  Bottom w5: IC2.1 890.81,30.63 v1(919.19,30.63)
  Bottom w8: IC3.5 494.79,74.41 498.66,70.53 498.66,60.14 508.58,50.23 508.58,32.17 C23.2
pads on no net: FD1.1 FD2.1 FD3.1 FD4.1 FD5.1 FD6.1 FD7.1 FD8.1 H1.P$1 H1.P$2 IC1.P$1 IC1.P$2 IC1.P$3 IC1.P$4 IC1.P$9 IC1.P$10 IC1.P$11 IC1.P$12 IC1.P$17 IC1.P$18 IC1.P$19 IC1.P$38 IC1.P$39 IC1.P$47 IC3.4 J1.0 J1.MH1 J1.MH2
copper on no net:
  other v2: 503.36,474 896.69,474 504.36,529 895.69,529
  other v3: 100.03,325 1300.03,325

## Polygon pours and split planes (outlines as drawn)
GND on 2-GND "GND_L02_P002" (solid, remove dead copper, pour order 2): 0,655.51 0,0 1400.59,0 1400.59,655.51
GND on 5-GND "GND_L05_P003" (solid, remove dead copper, pour order 3): 0,655.51 0,0 1400.59,0 1400.59,655.51
GND on Bottom "GND_L06_P004" (solid, remove dead copper, pour order 4): 0,655.51 0,0 1400.59,0 1400.59,655.51
GND on Top "GND_L01_P005" (solid, remove dead copper, pour order 5): 0,655.51 0,0 1400.59,0 1400.59,655.51

## Keep-outs
Keep-Out Layer:
  the board outline again, w4

## Other copper
Top:
  pour cut-out: 519.68,504.92 879.92,504.92 879.92,144.69 519.68,144.69 519.68,503.94
Bottom:
  rectangle: 883.32,462.44 946.25,540
  region: 516.73,540 453.8,540 453.8,462.44 516.73,462.44

## Silkscreen, mask and mechanical layers (free items; w line width, h text height)
Top Overlay:
  circle w10: c100.03,325 r90.14
  circle w10: c1300.03,325 r90.14
Bottom Overlay:
  text "AR0132 R1" at 985.34,415.44 h27.2 r270
  text "openmv.io" at 409.4,410.91 h27.2 r270
Dimension:
  lines w3.94: 1518.74,-88.96 1625.11,-88.96 1830.59,-88.96 1982.3,-88.96 ; 1518.74,-38 1625.11,-38 1830.59,-38 1982.3,-38 ; 1518.74,12.95 1625.11,12.95 1830.59,12.95 1982.3,12.95 ; 1518.74,63.91 1625.11,63.91 1830.59,63.91 1982.3,63.91 ; 1518.74,114.86 1625.11,114.86 1830.59,114.86 1982.3,114.86 ; 1518.74,165.82 1625.11,165.82 1830.59,165.82 1982.3,165.82 ; 1518.74,216.78 1625.11,216.78 1830.59,216.78 1982.3,216.78 ; 1518.74,267.73 1625.11,267.73 1830.59,267.73 1982.3,267.73 ; 1518.74,318.69 1625.11,318.69 1830.59,318.69 1982.3,318.69 ; 1518.74,369.64 1625.11,369.64 1830.59,369.64 1982.3,369.64 ; 1518.74,420.6 1625.11,420.6 1830.59,420.6 1982.3,420.6 ; 1518.74,471.55 1625.11,471.55 1830.59,471.55 1982.3,471.55 ; 1518.74,522.51 1625.11,522.51 1830.59,522.51 1982.3,522.51 ; 1518.74,573.46 1625.11,573.46 1830.59,573.46 1982.3,573.46 ; 1518.74,624.42 1982.3,624.42 ; 1625.11,675.37 1625.11,-139.91 ; 1830.59,675.37 1830.59,-139.91 ; 1625.11,-139.91 1518.74,-139.91 1518.74,675.37 1982.3,675.37 1982.3,-139.91 1830.59,-139.91 ; 1625.11,-139.91 1830.59,-139.91
  text "OpenMV HD-HDR-ALT-AR0132" at 558.1,693.18 h80
  text "Layer" at 1544.22,637.16 h25.48
  text "Name" at 1650.59,637.16 h25.48
  text "Thickness" at 1856.07,637.16 h25.48
  text "Top Overlay" at 1650.59,586.2 h25.48
  text "Top Solder" at 1650.59,535.25 h25.48
  text "0.010mm" at 1856.07,535.25 h25.48
  text "1" at 1544.22,484.29 h25.48
  text "Top" at 1650.59,484.29 h25.48
  text "0.035mm" at 1856.07,484.29 h25.48
  text "Dielectric 2" at 1650.59,433.33 h25.48
  text "0.127mm" at 1856.07,433.33 h25.48
  text "2" at 1544.2,382.38 h25.48
  text "2-GND" at 1650.56,382.38 h25.48
  text "0.035mm" at 1856.07,382.38 h25.48
  text "Dielectric 3" at 1650.59,331.42 h25.48
  text "0.254mm" at 1856.07,331.42 h25.48
  text "3" at 1544.22,280.47 h25.48
  text "3-SIG" at 1650.59,280.47 h25.48
  text "0.035mm" at 1856.07,280.47 h25.48
  text "Dielectric 1" at 1650.59,229.51 h25.48
  text "0.200mm" at 1856.07,229.51 h25.48
  text "4" at 1544.22,178.56 h25.48
  text "4-SIG" at 1650.59,178.56 h25.48
  text "0.035mm" at 1856.07,178.56 h25.48
  text "Dielectric 4" at 1650.59,127.6 h25.48
  text "0.254mm" at 1856.07,127.6 h25.48
  text "5" at 1544.22,76.65 h25.48
  text "5-GND" at 1650.59,76.65 h25.48
  text "0.035mm" at 1856.07,76.65 h25.48
  text "Dielectric 5" at 1650.59,25.69 h25.48
  text "0.127mm" at 1856.07,25.69 h25.48
  text "TG-170 or equivalent substrate  / Er = 4.3-4.5 @ 1MHz / +/- 10% /  / double side solder mask red / double side silkscreen white /  / 3 mil min trace width and / 3 mil min isolation /  / RoHS required" at 2160.43,12.35 h30
  text "6" at 1544.22,-25.26 h25.48
  text "Bottom" at 1650.59,-25.26 h25.48
  text "0.035mm" at 1856.07,-25.26 h25.48
  text "Bottom Solder" at 1650.59,-76.22 h25.48
  text "0.010mm" at 1856.07,-76.22 h25.48
  text "Bottom Overlay" at 1650.59,-127.17 h25.48